# Altium PCB BUCK-BOOST电路.PcbDoc
Units mm, origin at the board's own origin, x right, y up, seen from the top; angles counter-clockwise.
Board outline 84.96 x 55.75 mm, 2 copper layers (Top Layer, Bottom Layer); 36 components, 22 nets, 96 pads, 8 vias.
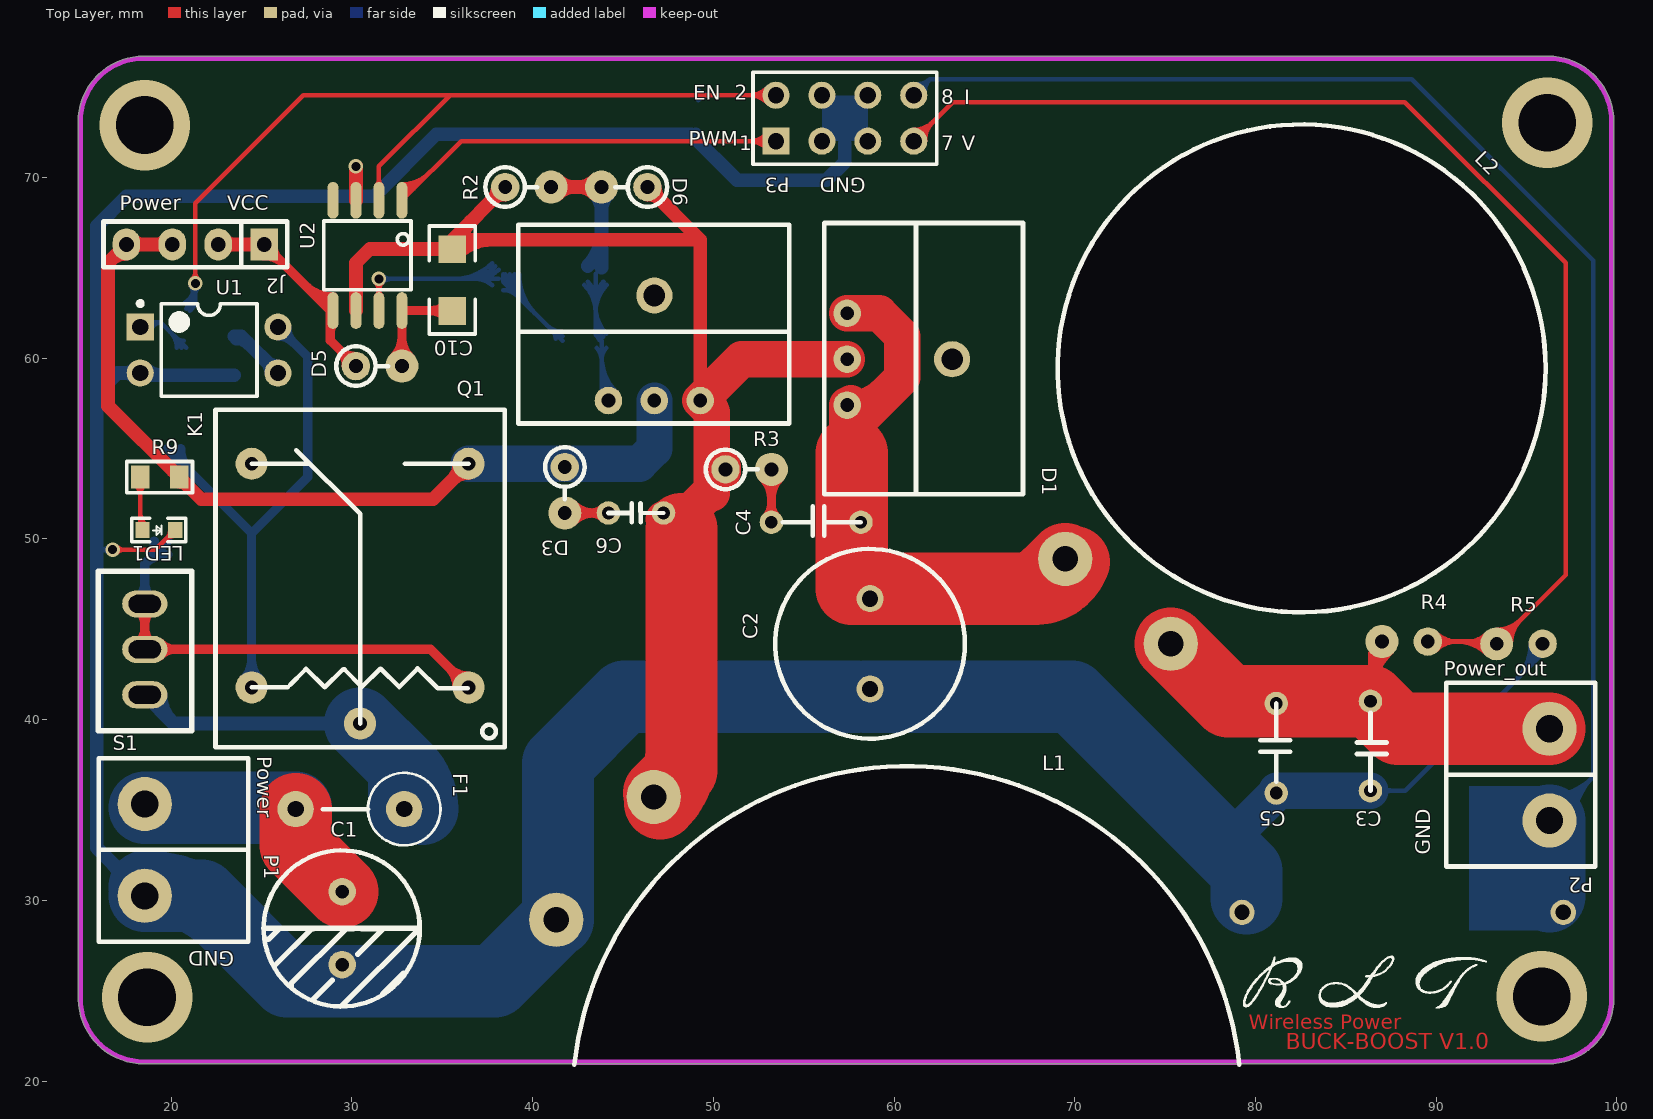
[diagram p0: Top Layer view]
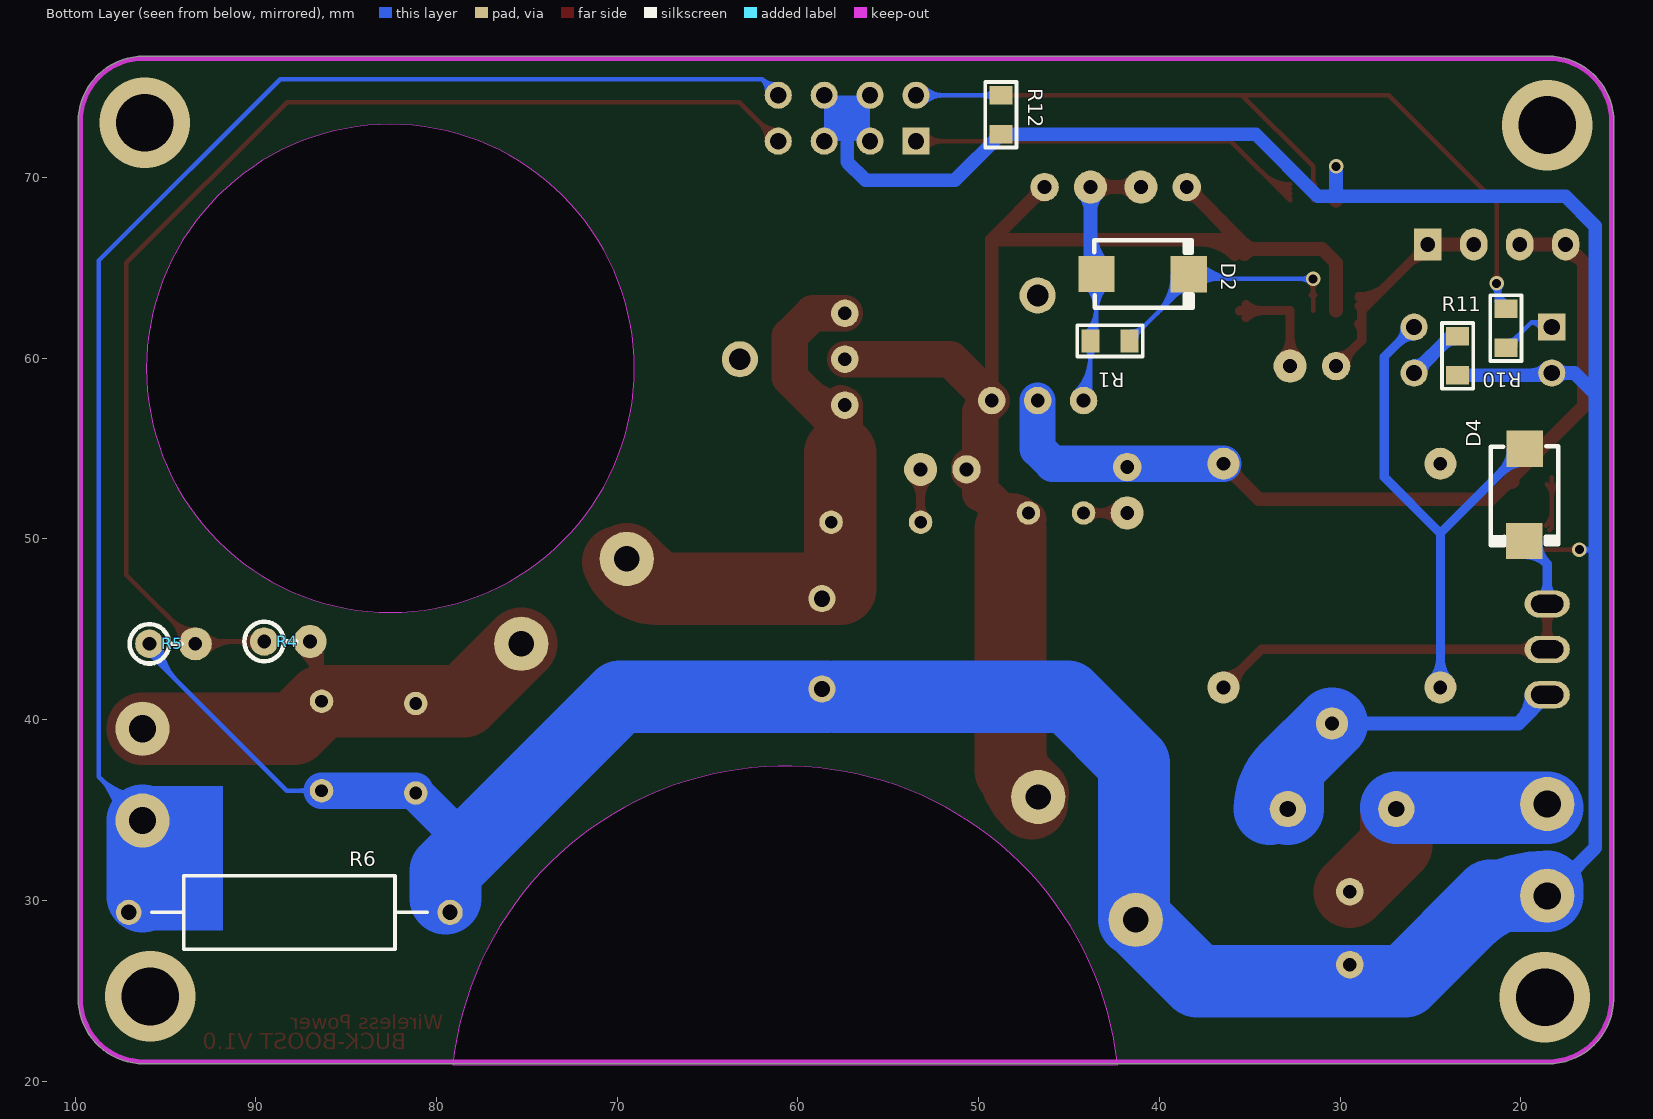
[diagram p1: Bottom Layer view, seen from below]
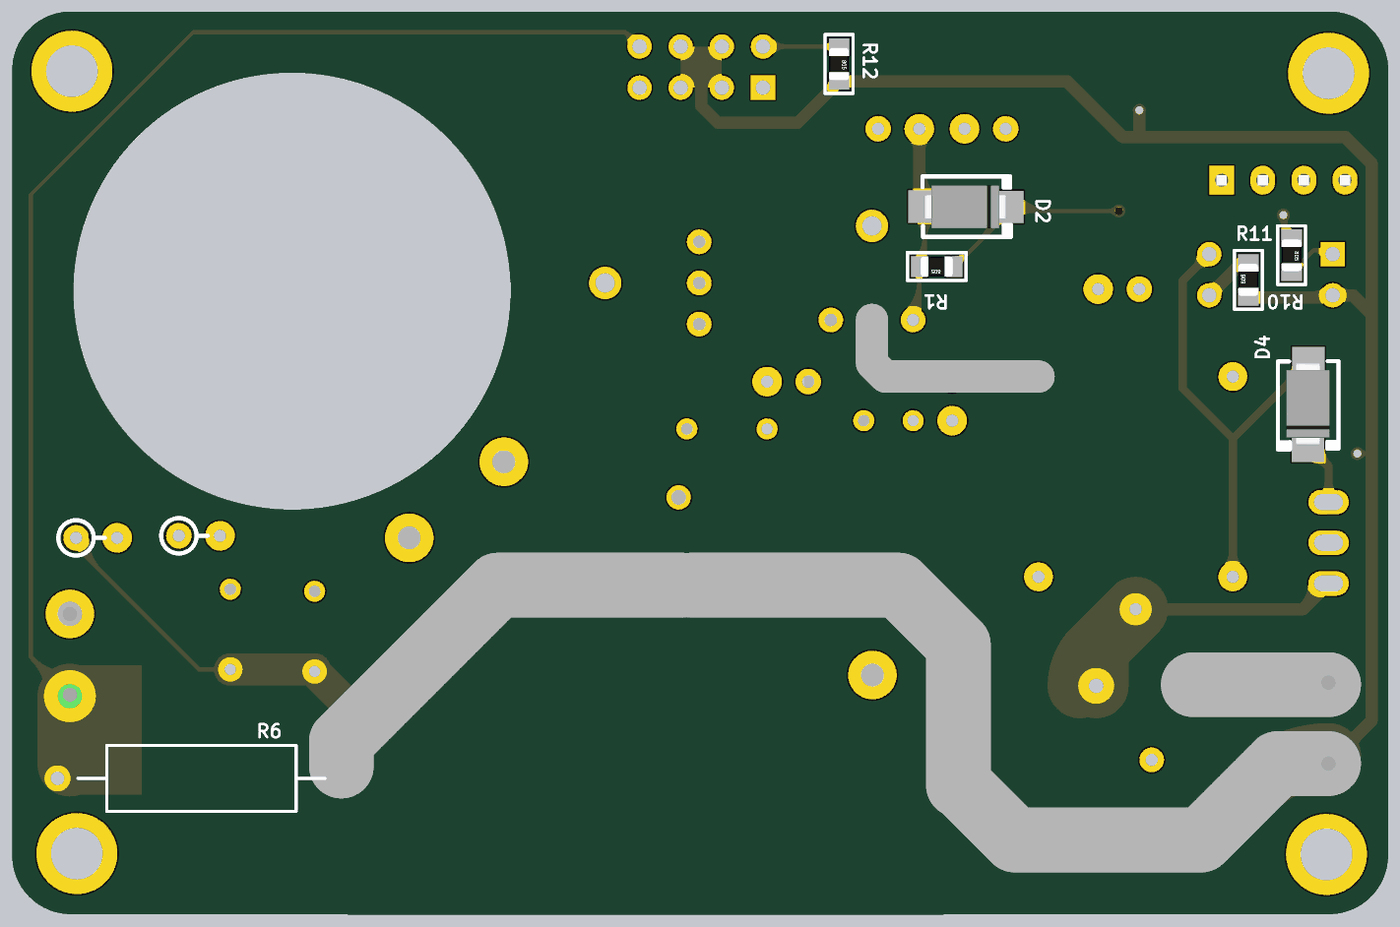
[diagram p2: 3D render of the assembled board from below, using the file's embedded part models]

## Layer stack, top to bottom
Top Solder: solder mask 0.0102, Solder Resist, Dk 3.5
Top Layer: signal copper 0.0356
Dielectric1: dielectric 0.32, FR-4, Dk 4.8
Bottom Layer: signal copper 0.0356
Bottom Solder: solder mask 0.0102, Solder Resist, Dk 3.5

## Board outline
14.859,24.575 14.859,73.076 cw(c14.985,73.088) 14.858,73.088 cw(c18.479,73.088) 18.479,76.709 cw(c18.479,76.582) 18.491,76.708 96.19,76.708 cw(c96.203,76.582) 96.203,76.709 cw(c96.203,73.088) 99.823,73.088 cw(c99.696,73.088) 99.822,73.076 99.822,24.587 cw(c99.696,24.575) 99.823,24.575 cw(c96.203,24.575) 96.203,20.954 cw(c96.203,21.081) 96.19,20.955 18.491,20.955 cw(c18.491,24.575) 14.871,24.52 cw(c14.986,24.575)

## Design rules (kind name [scope] priority, off if disabled: settings)
Clearance [All] p1: gap=0.254 ignorepadtopadclearanceinfootprint=FALSE except(0: Arc-Hole Track-Hole SMDPad-Hole THPad-Hole Via-Hole Fill-Hole Poly-Hole Region-Hole Text-Hole)
PolygonConnect [All] p1: connectstyle=Relief reliefconductorwidth=0.254 reliefentries=4 polygonreliefangle="90 Angle" airgapwidth=0.254
RoutingVias [All] p1: holewidth=0.711 width=1.27 viastyle="Through Hole" minholewidth=0.711 minwidth=1.27 maxholewidth=0.711 maxwidth=1.27
SolderMaskExpansion [All] p1: expansion=0.102 istentingtop=FALSE
Width [All] p1: maxlimit=5 minlimit=0.254 preferedwidth=0.254 minimp=50.000000 maximp=50.000000 favimp=50.000000
30 further rules are at their usual default settings.

## Components (designator, comment, footprint, x,y, rotation, side; value= is the part's Value field where it differs from the comment)
C1 "Cap Pol1" Elector_470uf_8*9/12*3mm 29.464,28.448 r270 top
C2 "Cap Pol1" RB5-10.5 58.674,44.196 r270 top
C3 "Cap" cb2 86.36,41.021 r270 top
C4 "Cap" CB2 53.213,50.927 r0 top
C5 "Cap" cb2 81.153,35.941 r90 top
C6 "Cap" CB1 47.244,51.435 r180 top
C10 "Cap" 1206 35.56,66.04 r270 top
D1 "MBR20150" LM317带散热片 57.404,59.944 r90 top
D2 "SS14" SK34-SMB/DO-214AA 38.354,64.643 r0 bottom
D3 "IN4007" AXIAL0.1Z 41.783,53.975 r270 top
D4 "SS14" SK34-SMB/DO-214AA 19.812,49.86 r90 bottom
D5 "IN4007" AXIAL0.1Z 30.226,59.563 r0 top
D6 "Diode 1N4007" AXIAL0.1Z 46.355,69.469 r180 top
F1 "Fuse 1" FUSE-L 32.893,35.052 r0 top
J2 "CON4" SIP4 21.336,66.294 r180 top
K1 "HHC66A-1Z-12VDC" HHC66A-1Z-12VDC电位器 27.559,45.974 r180 top
L1 "Inductor" BOOST升压电感2 60.706,18.923 r180 top
L2 "Inductor" BOOST电路滤波电感 82.55,59.436 r0 top
LED1 "" 0603_LED 18.415,50.495 r0 top
P1 "VCC" 050-2 18.542,32.791 r90 top
P2 "VCC" 050-2 96.266,36.957 r270 top
P3 "Header 4X2" HDR2X4 53.467,72.009 r0 top
Q1 "IRFB4115PBF" lm317带散热片 46.736,57.658 r180 top
R1 "Res1" 0805r 41.656,60.96 r0 bottom
R2 "Res1" AXIAL0.1Z 38.481,69.469 r0 top
R3 "Res1" AXIAL0.1Z 50.673,53.848 r0 top
R4 "Res1" AXIAL0.1Z 89.535,44.323 r180 bottom
R5 "Res1" AXIAL0.1Z 95.885,44.196 r180 bottom
R6 "Res1" AXIAL-0.7 88.138,29.337 r180 bottom
R9 "2K" 0805R 18.288,53.416 r0 top
R10 "Res1" 0805R 20.828,62.738 r270 bottom
R11 "Res1" 0805R 23.495,59.055 r90 bottom
R12 "Res1" 0805r 48.768,74.549 r270 bottom
S1 "switch1" Switch_8.2*5.2 18.542,43.891 r180 top
U1 "Optoisolator1" DIP-4 22.098,60.452 r0 top
U2 "IR2184s" SO-8NB 30.861,65.659 r180 top

## Footprints (in the part's own frame and the unit in brackets; to place one, negate y for a bottom-side part, rotate by r counter-clockwise, add the part's x,y. Pads: shape width x height; smd on the part's side, far side on the other; paste and mask are expansions set on the pad)
050-2 [mm]
  round 3 hole 1.5: 1(-2.54,0) 2(2.54,0)
  silkscreen extent -5.08,-5.71 5.08,2.54, body extent -5.04,-5.5 4.96,2.5, height 11.2
0603_LED [mm]
  rect 0.8x0.9 smd: 1(0,0) 2(1.8,0)
  silkscreen extent -0.6,-0.65 2.4,0.65, body extent 0.05,-0.37 1.67,0.43, height 0.6
0805r [mil]
  rect 40x50 smd: 1(0,0) 2(85,0)
  silkscreen extent -29,-34 114,34, body extent 3,-25 82,25, height 30
0805R [mil]
  rect 40x50 smd: 1(0,0) 2(85,0)
  silkscreen extent -29,-34 114,34, body extent 3,-25 82,25, height 30
1206 [mil]
  rect 60x60 smd: 1(0,0) 2(135,0)
  silkscreen extent -50,-50 185,50, body extent 4,-30 130,33, height 24
AXIAL0.1Z [mil]
  round 62 hole 30: 1(0,0)
  round 72 hole 30: 2(100,0)
  silkscreen extent -43,-43 70,43
AXIAL-0.7 [mm] "Axial Device, Thru-Hole; 2 Leads; 0.7 in Pin Spacing"
  round 1.4 hole 0.85: 1(-8.89,0) 2(8.89,0)
  silkscreen extent -7.62,-2.03 7.62,2.03
BOOST升压电感2 [mm]
  round 3 hole 1.4: 1(19.4,-10) 2(14,-16.8)
  Keep-Out Layer board cut-out: -18.394,-1.978 18.394,-1.978 15.321,-10.369 8.672,-16.341 0,-18.5 -8.672,-16.341 -15.321,-10.369 -18.394,-1.978
  silkscreen extent -18.39,-18.5 18.39,-1.98
BOOST电路滤波电感 [mm]
  round 3 hole 1.4: 1(-7.239,-15.24) 2(-13.081,-10.541)
  Keep-Out Layer board cut-out: 0,-13.5 -5.166,-12.472 -9.546,-9.546 -12.472,-5.166 -13.5,0 -13.5,0 -12.472,5.166 -9.546,9.546 -5.166,12.472 0,13.5 0,13.5 5.166,12.472 9.546,9.546 12.472,5.166 13.5,0 13.5,0 12.472,-5.166 9.546,-9.546 5.166,-12.472 0,-13.5
  silkscreen extent -13.5,-13.5 13.5,13.5
CB1 [mm]
  round 1.3 hole 0.7: 1(0,0) 2(3.048,0)
  silkscreen extent 0,-0.55 3.05,0.52
cb2 [mm]
  round 1.3 hole 0.7: 1(0,0) 2(4.953,0)
  silkscreen extent 0.64,-0.76 4.95,0.89
CB2 [mm]
  round 1.3 hole 0.7: 1(0,0) 2(4.953,0)
  silkscreen extent 0.64,-0.76 4.95,0.89
DIP-4 [mm] "DIP; 4 Leads; Row Spacing 7.62 mm; Pitch 2.54 mm"
  rect 1.5x1.5 hole 0.9: 1(-3.81,1.27)
  round 1.5 hole 0.9: 2(-3.81,-1.27) 3(3.81,-1.27) 4(3.81,1.27)
  silkscreen extent -3.93,-2.55 2.65,2.69, body extent -3.15,-2.5 3.15,2.5, height 5.6
Elector_470uf_8*9/12*3mm [mil]
  round 60 hole 30: 1(-80,0) 2(79,0)
  silkscreen extent -170,-171 170,169
FUSE-L [mil]
  round 79 hole 35.43: 1(-236.22,0) 2(0,0)
  silkscreen extent -177,-79 79,79, body extent -249,-74 78,83, height 545
HDR2X4 [mm] "Connector; Header; 4x2 Position"
  rect 1.5x1.5 hole 0.9: 1(0,0)
  round 1.5 hole 0.9: 2(0,2.54) 3(2.54,0) 4(2.54,2.54) 5(5.08,0) 6(5.08,2.54) 7(7.62,0) 8(7.62,2.54)
  silkscreen extent -1.27,-1.27 8.89,3.81
HHC66A-1Z-12VDC电位器 [mil]
  round 70 hole 30: 1(-113.98,243.62) 2(122.24,-322.36) 3(-350.2,-322.36) A(-350.2,164.88) B(122.24,164.88)
  silkscreen extent -429,-440 201,295
LM317带散热片 [mil]
  round 60 hole 30: 1(100,0) 2(0,0) 3(-100,0)
  round 78.74 hole 47.24: 4(0,-228.74)
  silkscreen extent -294,-383 297,50
lm317带散热片 [mil]
  round 60 hole 30: 1(100,0) 2(0,0) 3(-100,0)
  round 78.74 hole 47.24: 4(0,-228.74)
  silkscreen extent -294,-383 297,50
RB5-10.5 [mm] "Capacitor (Radial); 2 Leads"
  round 1.5 hole 0.9: 1(-2.5,0) 2(2.5,0)
  silkscreen extent -5.25,-5.25 5.25,5.25
SIP4 [mil]
  rect 60x70 hole 32: 1(-150,0)
  oval 60x70 hole 32: 2(-50,0) 3(50,0) 4(150,0)
  silkscreen extent -200,-50 200,50, body extent -200,-50 200,50, height 336
SK34-SMB/DO-214AA [mm]
  rect 2x2 smd: 1(5.131,-0.025) 2(0.025,0)
  silkscreen extent -0.2,-1.88 5.26,1.85, body extent 0.06,-1.33 5.17,1.33, height 2.12
SO-8NB [mil]
  oval 24x80 smd: 1(-75,-121) 2(-25,-121) 3(25,-121) 4(75,-121) 5(75,119) 6(25,119) 7(-25,119) 8(-75,119)
  silkscreen extent -95,-76 95,74, body extent -97,-119 96,117, height 61
Switch_8.2*5.2 [mm]
  oval 2.5x1.5 hole 1 slot 1.8 at 0 deg: 1(0,2.515) 2(0,0) 2(0,-2.515)
  silkscreen extent -2.59,-4.32 2.57,4.5

## Part data
C1 C2: "Polarized Capacitor (Radial)"
C3: library part "Cap Pol1", "Polarized Capacitor (Radial)"
C4 C5 C6 C10: "Capacitor"
D2 D3 D4 D5: library part Diode, "Default Diode"
D6: library part "Diode 1N4001", "1 Amp General Purpose Rectifier"
F1: "Fuse"
J2: "Connector"
LED1: library part LED2, "Typical RED, GREEN, YELLOW, AMBER GaAs LED"
P1 P2: library part POWER
P3: "Header, 4-Pin, Dual row"
R1 R2 R3 R4 R5 R6 R10 R11 R12: "Resistor"
R9: library part RES
U1: "4-Pin Phototransistor Optocoupler"

## Via types
v1: diameter 5, hole 3.2, Top Layer to Bottom Layer, 4 vias
v2: diameter 0.8, hole 0.5, Top Layer to Bottom Layer, tented both sides, 4 vias

## Nets (pads, with @x,y where several pads share a name; then routed paths per layer and width w, separated by ;. In a path a pad name is that pad's centre, name@x,y a point inside that pad or via, vN(x,y) a via of type N, cw(c..) or ccw(c..) an arc to the next point about the centre after c; other vN are vias at no path point)
+12: D3.1 J2.3 J2.4 K1.3 Q1.2 R9.2 | length 54.8
  Top Layer w0.762: 16.659,65.427 cw(c17.526,64.56) J2.4@17.526,65.786 ; J2.4@17.795,66.025 cw(c18.446,65.374) 18.446,66.294 cw(c18.446,67.214) J2.4@17.795,66.563 ; J2.3@19.797,66.025 ccw(c19.146,65.374) 19.146,66.294 ccw(c19.146,67.214) J2.3@19.797,66.563 ; R9.2@20.013,53.85 ccw(c20.447,54.283) R9.2@20.447,53.67 ; J2.3 J2.4 16.51,65.278 16.51,57.353 R9.2 21.666,52.197 34.489,52.197 K1.3 ; R9.2@20.447,53.162 cw(c20.447,52.549) R9.2@20.881,52.983 ; K1.3@35.946,54.162 cw(c34.72,54.162) 35.587,53.295 cw(c36.454,52.428) K1.3@36.454,53.654
  Bottom Layer w2: K1.3 45.907,54.162 46.736,54.991 Q1.2
GND: C1.2 C2.2 C3.2 C5.1 L1.1 LED1.2 P1.1 P3.3 P3.4 P3.5 P3.6 R5.1 R6.2 R11.1 R12.2 U1.2 U2.3 | length 224.6
  Top Layer w0.254: v2(16.764,49.403) 19.123,49.403 LED1.2 ; v2@16.957,49.21 cw(c17.423,48.744) 17.423,49.403 cw(c17.423,50.062) v2@16.957,49.596 ; 19.664,49.944 cw(c20.215,49.392) LED1.2@20.215,50.172 ; 19.784,50.065 ccw(c19.404,50.445) LED1.2@19.942,50.445
  Top Layer w0.762: U2.3 v2(30.226,70.612)
  Bottom Layer w0.254: 15.887,49.403 v2(16.764,49.403) ; v2@16.571,49.21 ccw(c16.105,48.744) 16.105,49.403 ccw(c16.105,50.062) v2@16.571,49.596 ; C3.2@85.979,36.068 88.284,36.068 R5.1@95.885,43.669 ; C3.2@86.73,35.698 cw(c87.623,34.805) 87.623,36.068 cw(c87.623,37.331) C3.2@86.73,36.438 ; 94.385,42.17 ccw(c92.359,44.196) R5.1@95.225,44.196 ; 94.819,42.603 ccw(c93.226,44.196) R5.1@95.479,44.196 ; 95.252,43.037 ccw(c94.093,44.196) R5.1@95.733,44.196 ; 95.657,43.441 cw(c95.885,43.213) R5.1@95.885,43.536
  Bottom Layer w0.762: P1.1@17.423,30.251 ccw(c14.721,30.251) 16.632,32.162 ccw(c18.542,34.072) P1.1@18.542,31.37 ; U1.2@18.027,58.921 ccw(c17.397,58.291) 17.397,59.182 ccw(c17.397,60.073) U1.2@18.027,59.443 ; U1.2 17.03,59.182 15.887,58.039 ; P1.1 15.887,32.906 15.887,49.403 15.887,58.039 ; U1.2@18.549,59.443 ccw(c19.485,60.379) 19.485,59.055 ; U1.2@18.669,59.055 R11.1 ; v2(30.226,70.612) 30.226,68.961 ; R12.2@49.022,72.39 ccw(c49.635,72.39) R12.2@49.202,71.956 ; 57.277,71.882 57.277,70.866 56.261,69.85 51.308,69.85 R12.2 34.671,72.39 31.242,68.961 30.226,68.961 ; 15.887,58.039 15.887,67.322 17.526,68.961 30.226,68.961
  Bottom Layer w2: 78.359,33.147 C5.1 ; C5.1@81.153,36.068 C3.2
  Bottom Layer w4: P1.1 21.692,30.251 26.416,25.527 37.91,25.527 L1.1 ; P1.1@18.542,30.751 cw(c18.542,24.355) 23.065,28.878 ; L1.1@41.402,28.923 41.402,37.592 45.085,41.275 57.912,41.275 ; C2.2@58.42,41.275 69.85,41.275 79.502,31.623 79.502,30.099
NetC1_1: C1.1 F1.1 P1.2 | length 14
  Top Layer w4: F1.1 26.893,33.051 C1.1
  Bottom Layer w4: P1.2@18.542,35.128 F1.1@26.893,35.128
NetC2_1: C2.1 C4.2 D1.1 D1.3 L2.2 | length 42.1
  Top Layer w2: D1.3@57.404,57.166 ccw(c57.404,60.271) 59.599,58.075 ; D1.3 57.404,55.88 ; D1.1 59.182,62.484 60.452,61.214 60.452,58.928 57.404,55.88 ; D1.3@57.608,57.526 cw(c56.45,56.834) 57.404,55.88
  Top Layer w4: 57.658,54.737 57.658,47.244 67.818,47.244 ; 66.69,47.244 ccw(c66.69,51.674) L2.2@69.823,48.541 ; L2.2 67.818,47.244 ; L2.2@69.938,48.722 cw(c67.818,49.504) 67.818,47.244
NetC3_1: C3.1 C5.2 L2.1 P2.1 R4.2 | length 44.1
  Top Layer w0.254: C3.1@85.99,41.391 ccw(c85.097,42.284) 86.36,42.284 ccw(c87.623,42.284) C3.1@86.73,41.391 ; C3.1@86.042,41.436 ccw(c85.422,42.246) 86.433,42.112 ; C3.1@86.067,41.454 ccw(c85.337,42.532) 86.615,42.286 ; C3.1@86.209,41.244 ccw(c85.823,41.814) 86.499,41.684 ; C3.1@86.36,40.961 cw(c90.258,40.961) R4.2@87.543,43.758 ; C3.1 86.36,43.688 R4.2 ; C3.1@86.36,41.561 cw(c89.675,41.561) R4.2@87.366,43.94 ; 86.36,42.162 cw(c89.092,42.162) R4.2@87.19,44.122 ; 86.36,42.762 cw(c88.51,42.762) R4.2@87.013,44.305 ; 86.36,43.362 cw(c87.927,43.362) R4.2@86.836,44.487 ; 86.376,41.68 ccw(c86.903,41.61) C3.1@86.542,41.219 ; 86.44,42.165 ccw(c87.309,42.049) C3.1@86.715,41.405 ; 86.605,42.232 ccw(c87.806,42) C3.1@86.793,41.314
  Top Layer w4: L2.1 78.486,41.021 C3.1 87.884,39.497 P2.1
NetC4_1: C4.1 R3.2 | length 6.9
  Top Layer w0.508: R3.2@52.746,53.381 cw(c51.619,52.254) 53.213,52.254 cw(c54.807,52.254) R3.2@53.68,53.381 ; C4.1@52.933,51.207 ccw(c52.257,51.883) 53.213,51.883 ccw(c54.169,51.883) C4.1@53.493,51.207 ; C4.1 R3.2
NetC6_1: C6.1 C10.1 D1.2 D6.1 L1.2 Q1.3 R2.1 R3.1 U2.6 | length 93
  Top Layer w0.762: U2.6 30.226,65.278 30.988,66.04 C10.1 C10.1@35.56,66.548 ; C10.1@35.291,65.771 ccw(c34.64,65.12) 34.64,66.04 ccw(c34.64,66.96) C10.1@35.291,66.309 ; C10.1@35.829,65.771 cw(c37.706,63.894) 37.706,66.548 ; C10.1@35.941,66.04 cw(c38.087,66.04) 36.57,67.558 ; R2.1@38.075,69.469 cw(c37.093,69.469) 37.787,68.775 cw(c38.481,68.081) R2.1@38.481,69.063 ; R2.1 C10.1@35.56,66.548 ; D6.1@46.355,69.063 cw(c46.355,68.081) 47.049,68.775 cw(c47.743,69.469) D6.1@46.761,69.469 ; D6.1 49.276,66.548 ; Q1.3@49.007,57.927 ccw(c48.356,58.578) 49.276,58.578 ccw(c50.196,58.578) Q1.3@49.545,57.927 ; Q1.3 49.276,66.548 ; C10.1@35.56,66.548 49.276,66.548
  Top Layer w2: C6.1@47.244,51.085 ccw(c47.244,53.613) 49.031,51.825 ; 47.625,50.419 49.911,52.705 49.911,57.023 Q1.3 51.562,59.944 D1.2 ; Q1.3@49.436,57.834 cw(c48.459,56.76) 49.911,56.76 ; Q1.3@49.444,57.826 cw(c48.318,56.7) 49.911,56.7 ; 49.911,52.522 cw(c51.999,52.522) R3.1@50.523,53.998 ; 49.911,55.174 ccw(c51.999,55.174) R3.1@50.523,53.698
  Top Layer w4: L1.2@46.99,35.941 48.243,37.194 48.243,50.546 ; L1.2@47.06,35.369 ccw(c44.202,38.227) 48.243,38.227
NetC6_2: C6.2 D3.2 | length 6.4
  Top Layer w0.508: D3.2 C6.2 ; D3.2@42.25,50.968 cw(c43.377,49.841) 43.377,51.435 cw(c43.377,53.029) D3.2@42.25,51.902 ; C6.2@43.916,51.155 ccw(c43.24,50.479) 43.24,51.435 ccw(c43.24,52.391) C6.2@43.916,51.715
NetC10_2: C10.2 D5.2 U2.8 | length 10.3
  Top Layer w0.508: D5.2@32.299,60.03 ccw(c31.172,61.157) 32.766,61.157 ccw(c34.36,61.157) D5.2@33.233,60.03 ; D5.2 U2.8 35.535,62.636 C10.2 ; 34.272,62.636 cw(c34.272,61.323) C10.2@35.201,62.252 ; 34.395,62.636 ccw(c34.395,63.776) C10.2@35.201,62.97
NetD2_1: D2.1 D6.2 Q1.1 R1.2 R2.2 | length 38.4
  Top Layer w0.762: R2.2 D6.2 ; R2.2@41.398,69.092 cw(c42.309,68.181) 42.309,69.469 cw(c42.309,70.757) R2.2@41.398,69.846 ; D6.2@43.438,69.092 ccw(c42.527,68.181) 42.527,69.469 ccw(c42.527,70.757) D6.2@43.438,69.846
  Bottom Layer w0.254: D2.1@42.867,64.051 cw(c41.377,62.561) 43.485,62.561 cw(c45.592,62.561) D2.1@44.102,64.051 ; D2.1@43.047,64.231 cw(c41.99,63.174) 43.485,63.174 cw(c44.979,63.174) D2.1@43.922,64.231 ; R1.2@43.485,61.578 ccw(c44.306,61.578) R1.2@43.725,60.997 ; 43.485,62.191 ccw(c44.919,62.191) R1.2@43.905,61.177 ; 43.485,62.804 ccw(c45.532,62.804) R1.2@44.084,61.356 ; D2.1 43.485,61.29 R1.2 43.815,58.039 Q1.1 ; R1.2@43.546,60.564 cw(c42.895,59.913) 43.815,59.913 cw(c44.735,59.913) R1.2@44.084,60.564 ; 43.815,58.884 ccw(c45.422,58.884) Q1.1@44.286,57.748 ; 43.815,59.498 ccw(c46.036,59.498) Q1.1@44.465,57.927 ; 43.815,60.111 ccw(c46.649,60.111) Q1.1@44.645,58.107
  Bottom Layer w0.762: D2.1@43.047,65.106 ccw(c41.193,66.96) 43.815,66.96 ; D6.2@43.438,69.092 cw(c42.527,68.181) 43.815,68.181 cw(c45.103,68.181) D6.2@44.192,69.092 ; D2.1@43.815,64.999 D6.2
NetD2_2: D2.2 R1.1 U2.7 | length 32.3
  Top Layer w0.254: v2@31.303,64.196 cw(c30.837,63.73) 31.496,63.73 cw(c32.155,63.73) v2@31.689,64.196 ; U2.7@31.37,63.473 ccw(c31.067,63.777) 31.496,63.777 ccw(c31.925,63.777) U2.7@31.622,63.473 ; U2.7 v2(31.496,64.389)
  Bottom Layer w0.254: v2(31.496,64.389) D2.2@38.125,64.389 ; v2@31.689,64.196 cw(c32.155,63.73) 32.155,64.389 cw(c32.155,65.048) v2@31.689,64.582 ; 35.659,64.389 ccw(c35.659,67.364) D2.2@37.762,65.26 ; 36.272,64.389 ccw(c36.272,66.751) D2.2@37.942,65.081 ; D2.2@37.762,64.026 ccw(c36.885,63.149) 36.885,64.389 ccw(c36.885,66.137) D2.2@38.121,64.901 ; D2.2@38.379,63.77 cw(c38.379,62.644) 39.176,63.44 ; D2.2 38.379,64.237 R1.1 ; D2.2@38.49,64.643 ccw(c39.74,64.643) D2.2@38.856,63.76 ; D2.2@38.744,64.643 ccw(c40.607,64.643) 39.29,63.326 ; D2.2@38.998,64.643 ccw(c41.474,64.643) 39.723,62.893 ; D2.2@39.252,64.643 ccw(c42.341,64.643) 40.157,62.459 ; 40.789,61.827 ccw(c41.656,62.694) R1.1@41.656,61.468 ; 41.095,61.521 cw(c40.662,61.087) R1.1@41.275,61.087 ; R1.1@41.222,61.394 ccw(c41.656,61.827) R1.1@41.656,61.214
NetD4_1: D4.1 K1.B U1.4 | length 35.9
  Bottom Layer w0.508: D4.1@19.787,54.245 cw(c19.787,52.444) 21.06,53.717 cw(c22.334,54.991) D4.1@20.533,54.991 ; D4.1 24.454,50.324 ; K1.B@24.005,42.235 ccw(c22.921,43.319) 24.454,43.319 ccw(c25.987,43.319) K1.B@24.903,42.235 ; K1.B 24.454,50.324 ; U1.4@25.908,61.226 cw(c25.908,60.029) 26.755,60.875 cw(c27.601,61.722) U1.4@26.404,61.722 ; U1.4@26.162,61.722 U1.4 27.559,60.071 27.559,53.429 24.454,50.324
NetD4_2: D4.2 K1.A S1.2 | length 38.1
  Top Layer w0.508: S1.2@18.191,44.242 ccw(c17.345,45.089) 18.542,45.089 ccw(c19.739,45.089) S1.2@18.893,44.242 ; S1.2@18.191,46.055 cw(c17.345,45.208) 18.542,45.208 cw(c19.739,45.208) S1.2@18.893,46.055 ; S1.2@18.542,46.406 18.542,43.891 34.349,43.891 K1.A ; S1.2@19.393,43.54 cw(c20.239,42.694) 20.239,43.891 cw(c20.239,45.089) S1.2@19.393,44.242 ; K1.A@35.819,41.786 ccw(c34.286,41.786) 35.37,42.87 ccw(c36.454,43.954) K1.A@36.454,42.421
  Bottom Layer w0.508: S1.2@18.191,46.757 ccw(c17.345,47.603) 18.542,47.603 ccw(c19.739,47.603) S1.2@18.893,46.757 ; S1.2@18.542,46.406 18.542,48.616 ; D4.2@19.066,49.884 cw(c17.277,49.881) 18.542,48.616 ; D4.2@19.811,49.14 ccw(c19.807,47.351) 18.542,48.616 ; D4.2 18.542,48.616
NetF1_2: F1.2 K1.1 S1.1 | length 26.8
  Bottom Layer w0.762: S1.1 20.133,39.786 K1.1 ; S1.1@19.411,41.377 ccw(c21.509,41.377) 20.025,39.893 ; K1.1@30.095,39.427 ccw(c29.228,38.56) 29.228,39.786 ccw(c29.228,41.012) K1.1@30.095,40.145
  Bottom Layer w4: K1.1 32.893,37.347 F1.2 ; 32.972,37.268 cw(c30.755,35.052) 33.89,35.052 ccw(c30.755,35.052) 32.972,37.268
NetLED1_1: LED1.1 R9.1 | length 5.3
  Top Layer w0.254: R9.1@18.019,53.02 cw(c17.368,52.369) 18.288,52.369 cw(c19.208,52.369) R9.1@18.557,53.02 ; 18.288,51.511 ccw(c19.381,51.511) LED1.1@18.608,50.738 ; R9.1 18.288,50.622 LED1.1
NetP2_2: P2.2 P3.8 R6.1 | length 92.8
  Bottom Layer w0.254: P3.8 61.976,75.438 ; P3.8@61.171,75.166 ccw(c61.299,76.115) 61.976,75.438 ; P3.8@61.704,74.633 cw(c62.653,74.761) 61.976,75.438 ; P2.2 98.679,36.83 98.679,65.405 88.646,75.438 61.976,75.438 ; P2.2@96.266,35.282 ccw(c96.266,37.37) 97.743,35.894 ccw(c99.219,34.417) P2.2@97.131,34.417 ; P2.2@96.266,35.536 ccw(c96.266,38.238) 98.176,36.327 ccw(c100.087,34.417) P2.2@97.385,34.417 ; P2.2@96.266,35.79 ccw(c96.266,39.105) 98.61,36.761 ccw(c100.954,34.417) P2.2@97.639,34.417
  Bottom Layer w4: 96.266,30.226 P2.2
NetP3_1: P3.1 U2.1 | length 29.7
  Top Layer w0.254: U2.1 36.043,72.009 P3.1 ; U2.1@32.766,68.859 ccw(c32.766,69.166) U2.1@32.983,68.949 ; U2.1@32.766,69.113 ccw(c32.766,70.033) 33.416,69.383 ; U2.1@32.766,69.367 ccw(c32.766,70.9) 33.85,69.816 ; U2.1@32.766,69.621 ccw(c32.766,71.768) 34.284,70.25 ; P3.1@53.026,71.568 ccw(c51.963,70.505) 51.963,72.009 ccw(c51.963,73.513) P3.1@53.026,72.45 ; P3.1@53.206,71.748 ccw(c52.576,71.118) 52.576,72.009 ccw(c52.576,72.9) P3.1@53.206,72.27
NetP3_2: P3.2 R10.1 R12.1 U2.2 | length 68.5
  Top Layer w0.254: v2@21.143,64.328 ccw(c20.677,64.794) 21.336,64.794 ccw(c21.995,64.794) v2@21.529,64.328 ; v2(21.336,64.135) 21.336,68.58 27.305,74.549 35.433,74.549 ; U2.2@31.37,69.569 ccw(c31.067,69.873) 31.496,69.873 ccw(c31.925,69.873) U2.2@31.622,69.569 ; U2.2 31.496,70.612 35.433,74.549 ; P3.2@53.026,74.108 ccw(c51.963,73.045) 51.963,74.549 ccw(c51.963,76.053) P3.2@53.026,74.99 ; P3.2@53.206,74.288 ccw(c52.576,73.658) 52.576,74.549 ccw(c52.576,75.44) P3.2@53.206,74.81 ; P3.2 35.433,74.549
  Bottom Layer w0.254: R10.1@20.749,63.058 ccw(c20.056,64.135) v2(21.336,64.135) 21.336,63.246 R10.1 ; R10.1@20.886,62.845 ccw(c20.355,63.669) 21.336,63.669 ; R10.1@21.024,62.631 ccw(c20.655,63.204) R10.1@21.336,63.204 ; v2@21.1,63.999 cw(c20.529,63.669) 21.165,63.498 cw(c21.802,63.328) v2@21.472,63.899 ; v2@21.143,63.942 cw(c20.677,63.476) 21.336,63.476 cw(c21.995,63.476) v2@21.529,63.942 ; R12.1 P3.2 ; R12.1@49.164,74.28 cw(c49.815,73.629) 49.815,74.549 cw(c49.815,75.469) R12.1@49.164,74.818 ; P3.2@53.026,74.108 ccw(c51.963,73.045) 51.963,74.549 ccw(c51.963,76.053) P3.2@53.026,74.99 ; P3.2@53.206,74.288 ccw(c52.576,73.658) 52.576,74.549 ccw(c52.576,75.44) P3.2@53.206,74.81
NetP3_7: P3.7 R4.1 R5.2 | length 85.7
  Top Layer w0.254: P3.7 63.246,74.168 88.265,74.168 97.155,65.278 97.155,48.006 R5.2 ; P3.7@61.087,72.378 ccw(c61.087,73.269) 61.717,72.639 ccw(c62.347,72.009) P3.7@61.456,72.009 ; P3.7@61.087,72.632 ccw(c61.087,74.136) 62.151,73.073 ccw(c63.214,72.009) P3.7@61.71,72.009 ; R4.1 R5.2@93.218,44.323 ; R4.1@89.822,44.036 cw(c90.516,43.342) 90.516,44.323 cw(c90.516,45.304) R4.1@89.822,44.61 ; R4.1@90.002,43.856 cw(c91.129,42.729) 91.129,44.323 cw(c91.129,45.917) R4.1@90.002,44.79 ; 91.137,44.323 cw(c91.137,41.988) R5.2@92.788,43.639 ; R5.2@92.788,44.753 cw(c91.751,45.79) 91.751,44.323 cw(c91.751,42.602) R5.2@92.968,43.819 ; R5.2@92.968,44.573 cw(c92.364,45.177) 92.364,44.323 cw(c92.364,43.215) R5.2@93.147,43.998 ; R5.2@93.345,44.729 ccw(c93.345,46.017) 94.256,45.107 ccw(c95.166,44.196) R5.2@93.878,44.196 ; R5.2@93.345,44.983 ccw(c93.345,46.884) 94.689,45.54 ccw(c96.033,44.196) R5.2@94.132,44.196
NetR10_2: R10.2 U1.1 | length 6.9
  Bottom Layer w0.254: U1.1@18.288,61.976 19.431,61.976 ; U1.1@18.644,61.626 cw(c19.1,61.504) 19.1,61.976 ; U1.1@18.729,62.163 ccw(c19.179,62.613) 19.179,61.976 ; U1.1@18.89,61.561 cw(c19.431,61.416) 19.431,61.976 ; 19.961,61.446 cw(c19.094,60.579) R10.2@20.32,60.579 ; 20.267,61.14 ccw(c20.701,61.573) R10.2@20.701,60.96 ; R10.2@20.394,61.013 cw(c19.961,60.579) R10.2@20.574,60.579 ; R10.2 19.431,61.976
NetR11_2: R11.2 U1.3 | length 5.4
  Bottom Layer w0.762: R11.2 23.876,61.214 U1.3 ; R11.2@23.622,61.087 cw(c23.622,60.167) 24.272,60.818 ; U1.3@25.539,59.182 ccw(c24.648,59.182) 25.278,59.812 ccw(c25.908,60.442) U1.3@25.908,59.551
VCC: D5.1 J2.1 J2.2 U2.5 | length 21.2
  Top Layer w0.508: J2.1@25.146,65.659 cw(c25.146,64.126) 26.23,65.21 ; J2.1 28.804,62.636 28.804,60.985 D5.1 ; J2.1@25.654,66.167 ccw(c26.574,66.167) 25.923,65.517 ; 27.395,64.045 ccw(c28.956,65.606) U2.5@28.956,63.398 ; 28.262,63.178 ccw(c28.956,63.872) U2.5@28.956,62.89 ; 28.804,61.435 cw(c29.447,61.435) U2.5@28.992,61.889 ; D5.1@29.693,59.563 ccw(c28.405,59.563) 29.315,60.474 ccw(c30.226,61.384) D5.1@30.226,60.096
  Top Layer w0.762: J2.2 J2.1 ; J2.2@22.875,66.025 cw(c23.526,65.374) 23.526,66.294 cw(c23.526,67.214) J2.2@22.875,66.563 ; J2.1@24.877,66.025 ccw(c24.226,65.374) 24.226,66.294 ccw(c24.226,67.214) J2.1@24.877,66.563
pads on no net: D1.4 K1.2 Q1.4 U2.4
copper on no net:
  other v1: 18.669,24.638 95.834,24.689 18.542,72.898 96.139,73.025

## Keep-outs
Keep-Out Layer:
  lines w0.254: 18.479,21.082 cw(c18.479,24.575) 14.986,24.575 14.986,73.088 cw(c18.479,73.088) 18.479,76.582 96.203,76.581 cw(c96.203,73.088) 99.696,73.088 ; 18.491,21.082 96.241,21.082 ; 96.203,21.081 ccw(c96.203,24.575) 99.696,24.575 ; 99.695,24.536 99.695,73.089

## Other copper
Top Layer:
  text "Wireless Power" at 79.629,22.86 h0.8
  text "BUCK-BOOST V1.0" at 81.661,21.463 h1.52
Bottom Layer:
  region net NetP2_2: 96.266,36.322 91.821,36.322 91.821,28.321 96.266,28.321
  rectangle net GND: 56.007,72.009 58.547,74.549

## Silkscreen, mask and mechanical layers (free items; w line width, h text height)
Top Overlay:
  drawing of 784 lines, arcs and shapes, not listed
  text "EN" at 48.895,74.295 h0.8
  text "I" at 63.881,74.041 h0.8
  text "PWM" at 48.641,71.755 h0.8
  text "V" at 63.754,71.501 h0.8
  text "GND" at 58.42,69.977 h0.8 r180
  text "Power" at 17.145,68.199 h0.8
  text "VCC" at 23.114,68.199 h0.8
  text "Power_out" at 90.424,42.418 h0.8
  text "Power" at 24.765,37.973 h0.8 r270
  text "GND" at 89.662,32.512 h0.8 r90
  text "GND" at 23.495,27.178 h0.8 r180
Top Solder:
  text "Wireless Power" at 79.629,22.86 h0.8
  text "BUCK-BOOST V1.0" at 81.661,21.463 h1.52

## Text inside footprints (layer, text, board x,y; h text height)
P3: Top Overlay "2" at 51.181,74.295 h0.8; Top Overlay "1" at 51.435,71.501 h0.8; Top Overlay "7" at 62.611,71.501 h0.8; Top Overlay "8" at 62.611,74.041 h0.8